# EAGLE board test2 (EAGLE 9.5.0)
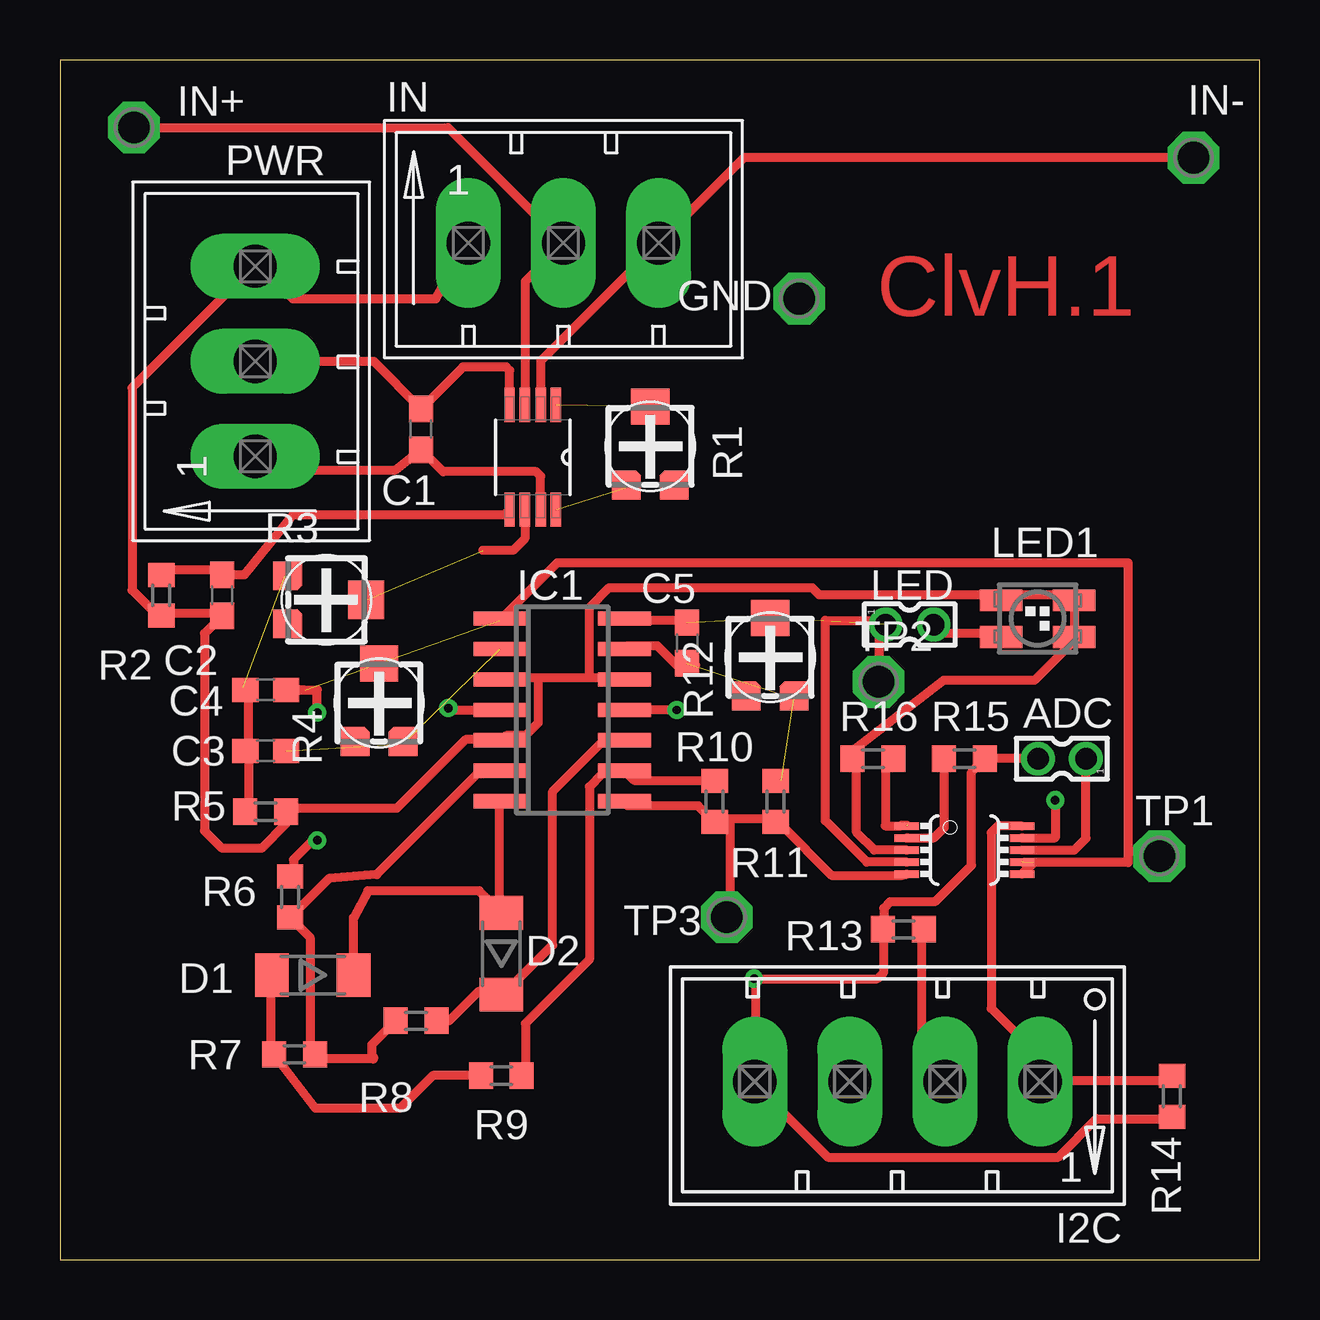
[diagram p0: board, top side]
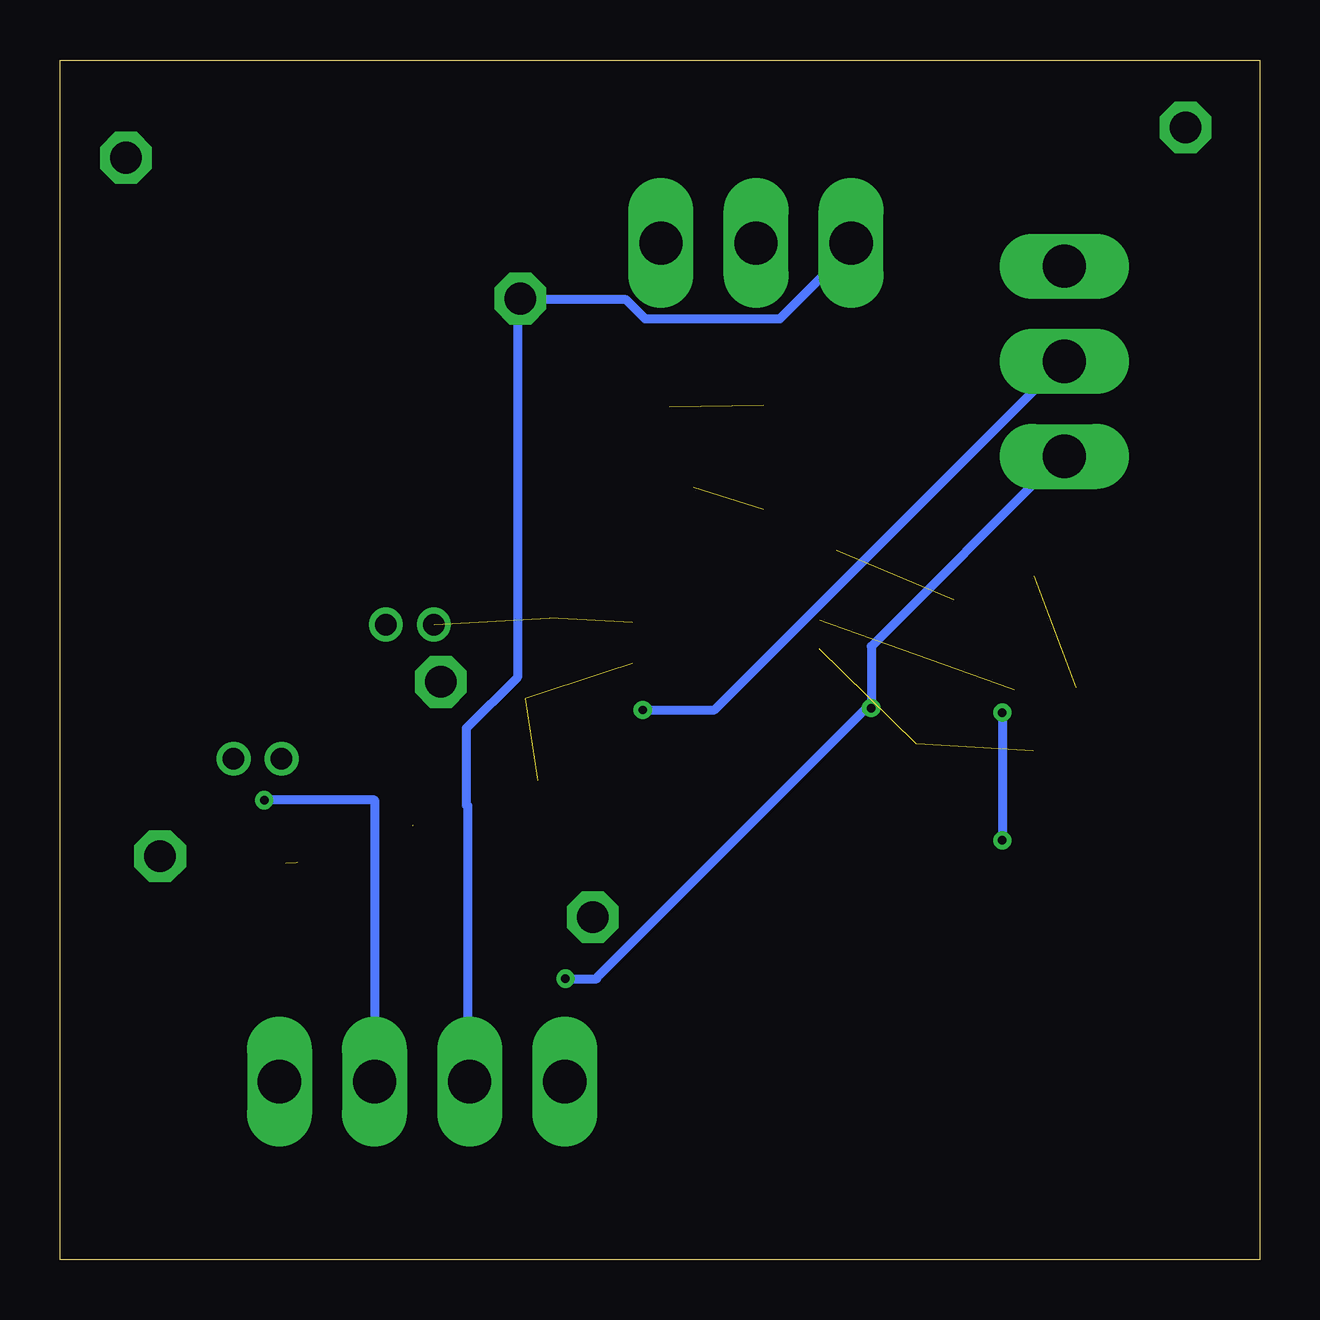
[diagram p1: board, bottom side, seen from below]

Size 50 x 50 mm. Coordinates in mm from the lower left corner, seen from the top.
Outline: 0,0 50,0 50,50 0,50 0,0
Copper layers (1*16): Top 0.035mm / dielectric 1.5mm / Bottom 0.035mm
Design rules "default *": minimum track width 15mil, minimum drill 0.35mm, track to track 6mil, track to pad 6mil, pad to pad 6mil, via to via 6mil, smd to smd 6mil, copper to edge 40mil, drill to drill 6mil, minimum pad ring 10mil, minimum via ring 8mil, stop-mask expansion 4mil, vias tented up to drill 0mil, thermal gap 10mil

## Footprints (pad centres in the part's own frame; a part is rotated, then mirrored left to right if it is on the bottom)
332-02 = drill 0.9 pad 1.27: 1 0,-1; 2 0,1
C0603 = smd 1.1 x 1: 1 -0.85,0; 2 0.85,0
SOD80 = smd 1.4 x 1.8: 1 -1.7,0; 2 1.7,0
P1-13 = drill 1.321 pad 2.159 octagon: TP 0,0
MT6-4Y = drill 1.803 long: 1 -5.944,0; 2 -1.981,0; 3 1.981,0; 4 5.944,0
SO14 = smd 0.6 x 2.2: 1 -3.81,-2.6; 2 -2.54,-2.6; 3 -1.27,-2.6; 4 0,-2.6; 5 1.27,-2.6; 6 2.54,-2.6; 7 3.81,-2.6; 8 3.81,2.6; 9 2.54,2.6; 10 1.27,2.6; 11 0,2.6; 12 -1.27,2.6; 13 -2.54,2.6; 14 -3.81,2.6
MT6-3 = drill 1.803 long: 1 2.54,0; 2 6.502,0; 3 10.465,0
P-LCC-4-3 = smd 0.914 x 1.778: 1 -0.762,-1.524; 2 -0.762,1.524; 3 0.762,1.524; 4 0.762,-1.524
SOP65P490X110-8N = smd 1.422 x 0.432: 1 -2.184,0.965; 2 -2.184,0.33; 3 -2.184,-0.33; 4 -2.184,-0.965; 5 2.184,-0.965; 6 2.184,-0.33; 7 2.184,0.33; 8 2.184,0.965
RTRIM4G/J = smd 1.2 x 1: 1 -1,-1.72; 3 1,-1.72 | smd 1.6 x 1.5: 2 0,1.65 | smd 0.3 x 0.3 rotated 225: P$1 -0.6,-1.22; P$4 0.6,-1.22 | smd 1 x 0.25: P$2 -1.1,-1.13; P$3 1.1,-1.13
R0603 = smd 1 x 1.1: 1 -0.85,0; 2 0.85,0
MSOP10_0.5 = smd 0.3 x 1.02: 1 -1,-2.4; 2 -0.5,-2.4; 3 0,-2.4; 4 0.5,-2.4; 5 1,-2.4; 6 1,2.4; 7 0.5,2.4; 8 0,2.4; 9 -0.5,2.4; 10 -1,2.4

## Placement (x,y rotation side)
ADC  332-02  [332-02]  41.76,20.88 90 top
C1  0.1nF  [C0603]  15.06,34.61 90 top
C2  1nF  [C0603]  6.77,27.69 90 top
C3  0.1nF  [C0603]  8.58,21.21 180 top
C4  0.1nF  [C0603]  8.58,23.75 180 top
C5  0.1nF  [C0603]  26.13,25.7 270 top
D1  [SOD80]  10.54,11.86 180 top
D2  [SOD80]  18.4,12.75 90 top
GND  PTR1PAD1-13  [P1-13]  30.81,40.06 0 top
I2C  [MT6-4Y]  34.91,7.41 180 top
IC1  LMV324M  [SO14]  20.94,22.91 270 top
IN  [MT6-3]  14.49,42.37 0 top
IN+  PTR1PAD1-13  [P1-13]  3.09,47.19 0 top
IN-  PTR1PAD1-13  [P1-13]  47.25,45.92 0 top
LED  332-02  [332-02]  35.41,26.46 270 top
LED1  [P-LCC-4-3]  40.75,26.72 90 top
PRECI_AMP  INA326EA/250  [SOP65P490X110-8N]  19.71,33.44 270 top
PWR  [MT6-3]  8.14,30.94 90 top
R1  [RTRIM4G/J]  24.6,33.9 0 top
R2  100k  [R0603]  4.23,27.69 90 top
R3  [RTRIM4G/J]  11.1,27.5 270 top
R4  [RTRIM4G/J]  13.3,23.2 0 top
R5  100k  [R0603]  8.58,18.67 0 top
R6  100k  [R0603]  9.59,15.11 270 top
R7  100k  [R0603]  9.78,8.55 180 top
R8  100k  [R0603]  14.84,9.95 0 top
R9  100k  [R0603]  18.4,7.67 0 top
R10  100k  [R0603]  27.29,19.1 270 top
R11  100k  [R0603]  29.83,19.1 90 top
R12  [RTRIM4G/J]  29.6,25.1 0 top
R13  100k  [R0603]  35.16,13.76 180 top
R14  100k  [R0603]  46.35,6.81 90 top
R15  100k  [R0603]  37.7,20.88 180 top
R16  100k  [R0603]  33.89,20.88 180 top
TP1  PTR1PAD1-13  [P1-13]  45.83,16.81 0 top
TP2  PTR1PAD1-13  [P1-13]  34.13,24.08 0 top
TP3  PTR1PAD1-13  [P1-13]  27.79,14.27 0 top
U$1  ADS1015IDGT  [MSOP10_0.5]  37.7,17.07 270 top

## Library data of the parts
ADC LED = con-garry
C1-C5 = rcl; SPICEPREFIX: C
D1 D2 = semicon-smd-ipc
GND IN+ IN- TP1-TP3 = testpad
I2C = con-amp-mt; OC_FARNELL: unknown; OC_NEWARK: unknown
IC1 = linear; SPICEPREFIX: J
IN PWR = con-amp-mt6; OC_FARNELL: unknown; OC_NEWARK: unknown
LED1 = led
PRECI_AMP = INA326EA_250; DESCRIPTION: Precision, Low Drift, CMOS Instrumentation Amplifier 8-VSSOP -40 to 85; DIGI-KEY_PART_NUMBER: 296-15312-1-ND; DIGI-KEY_PURCHASE_URL: https://www.digikey.com/product-detail/en/texas-instruments/INA326EA-250/296-15312-1-ND/568254?utm_source=snapeda&utm_medium=aggregator&utm_campaign=symbol; MF: Texas Instruments; MP: INA326EA/250; PACKAGE: MSOP-8 Texas Instruments
R1 R3 R4 R12 = trimmer; SPICEMODEL: X; SPICEPREFIXL: POT
R2 R5-R11 R13-R16 = rcl; SPICEPREFIX: R
U$1 = ADS1015; AVAILABILITY: Unavailable; DESCRIPTION: 12-Bit ADC with Integrated MUX PGA Comparator Oscillator and Reference; MF: Texas Instruments; MP: ADS1015; PACKAGE: XFQFN-10 Texas Instruments; PRICE: None

## Nets
GNDA: C2.1 GND.TP I2C.3 IC1.3 IC1.5 IC1.12 IN.1 LED1.1 LED1.3 LED1.4 PWR.3 R2.1 R5.2 R16.2 U$1.3
N$1: PRECI_AMP.1 R1.2
N$2: PRECI_AMP.8 R1.1
N$3: IN+.TP IN.2 PRECI_AMP.3
N$4: C2.2 PRECI_AMP.5 R2.2
N$5: IN-.TP IN.3 PRECI_AMP.2
N$6: C3.2 C4.2 R3.1 R5.1
N$7: C3.1 IC1.2 R4.3
N$8: C4.1 IC1.1 R4.2 R6.1 TP1.TP U$1.6 U$1.7
N$9: PRECI_AMP.6 R3.2
N$10: IC1.6 R6.2 R7.1 R8.1
N$11: D2.1 IC1.10 R8.2
N$12: IC1.9 R9.2 R10.1
N$13: D1.1 D2.2 IC1.7
N$14: D1.2 R7.2 R9.1
N$15: IC1.8 R10.2 R11.1 TP3.TP U$1.5
N$16: C5.2 IC1.13 R11.2 R12.3
N$17: I2C.2 R13.1 U$1.9
N$18: R16.1 U$1.1
N$19: R15.2 U$1.2
N$20: LED1.2 LED.2
N$21: I2C.1 R14.2 U$1.10
N$22: C5.1 IC1.14 LED.1 R12.2 TP2.TP U$1.4
V+: ADC.2 C1.1 I2C.4 IC1.4 PRECI_AMP.7 PWR.1 R13.2 R14.1 R15.1
V-: C1.2 IC1.11 PRECI_AMP.4 PWR.2
VDD: ADC.1 U$1.8

## Tracks (layer width: path | path; a pad name or v marks a point on that pad's centre or on a via)
GNDA
  Top 0.381: PWR.3 8.37,41.38 9.7,40.04 15.66,40.04 IN.1 17.03,40.08 | 22.07,24.24 23.4,24.24 IC1.12 | 22.07,24.24 19.93,24.24 | 19.93,24.24 18.6,24.24 IC1.3 | 22.07,24.24 22.07,27.18 22.89,28 31.35,28 31.64,27.71 39.16,27.71 LED1.3 39.22,27.66 39.26,27.7 42.23,27.7 42.27,27.66 LED1.4 LED1.1 42.27,25.8 40.61,24.14 36.83,24.14 33.04,21.21 R16.2 33.2,20.74 33.2,17.8 33.94,17.07 U$1.3 | 19.93,24.24 19.93,22.38 19.4,21.84 18.6,21.84 IC1.5 18.3,21.67 16.91,21.67 14.04,18.81 9.46,18.81 R5.2 9.43,18.17 8.4,17.14 6.76,17.14 6.03,17.88 6.03,26.1 C2.1 6.67,26.94 4.27,26.94 R2.1 4.07,26.84 3,27.9 3,36.34 8,41.34 PWR.3 | 8.1,41.38 PWR.3 | GND.TP 30.91,40.16
  Bottom 0.381: I2C.3 33,7.44 33,18.91 33.07,18.94 33.07,22.14 30.94,24.27 30.94,40.01 GND.TP | 31,40.01 GND.TP | GND.TP 30.67,40.01 26.4,40.01 25.6,39.2 20,39.2 17.07,42.14 IN.1
N$1  (1 unrouted)
N$2  (1 unrouted)
N$3
  Top 0.381: PRECI_AMP.3 19.39,35.63 19.39,40.77 IN.2 16.17,47.19 IN+.TP
N$4
  Top 0.381: R2.2 4.26,28.74 6.66,28.74 C2.2 7.68,28.54 9.72,31.05 18.54,31.05 PRECI_AMP.5
N$5
  Top 0.381: PRECI_AMP.2 20.04,37.45 IN.3 28.51,45.92 IN-.TP
N$6  (1 unrouted)
  Top 0.381: 7.87,21.21 7.87,18.81 R5.1 | 7.87,21.21 7.87,23.61 C4.2 7.63,23.85 | 7.87,21.21 C3.2
N$7  (2 unrouted)
N$8  (via drill 0.35)  (4 unrouted)
  Top 0.381: v10.72,22.8 10.72,23.75 C4.1 9.44,23.73 10.21,23.73 | 40.16,16.55 44.52,16.55 44.52,17.04 | 44.52,17.04 44.52,29.04 20.73,29.04 18.6,26.91 IC1.1 18.33,26.64 | R6.1 9.73,16.14 9.73,16.67 10.53,17.47 v10.72,17.47 | 44.52,17.04 45.8,17.04 TP1.TP | 40.6,16.53 40.57,16.53 U$1.6
  Bottom 0.381: v10.72,22.8 v10.72,17.47
N$9  (1 unrouted)
  Top 0.381: PRECI_AMP.6 19.38,30.05 18.88,29.55 17.63,29.55
N$10
  Top 0.381: IC1.6 18.33,20.24 17.53,20.24 IC1.6 | R8.1 12.99,8.95 12.99,8.55 13.06,8.44 13.06,8.36 10.66,8.36 10.66,8.44 R7.1 10.42,8.76 10.42,13.43 R6.2 11.21,15.88 13.21,16.05 17.54,20.38 18.33,20.38 IC1.6
N$11
  Top 0.381: IC1.10 23.4,21.57 22.6,21.57 20.53,19.51 20.53,13.11 18.6,11.17 D2.1 18.33,11.17 17.44,11.17 16.22,9.95 R8.2
N$12
  Top 0.381: R9.2 19.4,7.71 19.4,9.84 22.07,12.51 22.07,19.71 22.6,20.24 23.4,20.24 IC1.9 23.67,20.24 23.93,19.97 27.13,19.97 R10.1
N$13
  Top 0.381: IC1.7 18.33,18.91 18.33,14.64 D2.2 17.47,15.37 12.84,15.37 12.24,14.24 D1.1
N$14
  Top 0.381: R9.1 15.55,7.67 14.18,6.31 10.65,6.31 R7.2 8.8,8.71 8.8,11.64 D1.2
N$15
  Top 0.381: U$1.5 35.1,16.01 32.16,16.01 30.07,18.11 R11.1 29.8,18.37 27.93,18.37 | 27.93,18.37 27.4,18.37 R10.2 27.13,18.37 26.6,18.91 23.67,18.91 IC1.8 | 27.93,18.37 27.93,14.37 TP3.TP
N$16  (2 unrouted)
  Top 0.381: 26.5,24.77 26.23,24.77 C5.2 26.5,24.77 | 30.07,19.97 R11.2 | 26.5,24.77 26.23,24.51 25.97,24.51 24.9,25.57 23.67,25.57 IC1.13
N$17  (via drill 0.35)
  Top 0.381: U$1.9 41.48,17.57 v41.48,19.15 | R13.1 35.94,13.57 35.94,8.24 36.73,7.44 I2C.2
  Bottom 0.381: v41.48,19.15 36.89,19.15 I2C.2
N$18  (1 unrouted)
  Top 0.381: R16.1 34.4,20.53 34.4,18.08 35.06,18.08 35.09,18.11 35.3,18.11
N$19
  Top 0.381: R15.2 36.85,17.99 36.43,17.57 U$1.2
N$20
  Top 0.381: LED1.2 39.13,26.11 36.73,26.11 36.47,26.38 LED.2
N$21
  Top 0.381: U$1.10 39.08,18.07 38.82,17.8 38.82,10.46 40.85,8.43 I2C.1 41.07,7.47 46.14,7.47 R14.2
N$22  (2 unrouted)
  Top 0.381: U$1.4 33.63,16.57 31.9,18.29 31.9,26.64 34.33,26.64 LED.1 34.13,26.18 TP2.TP | IC1.14 23.67,26.64 25.97,26.64 C5.1
V+  (via drill 0.35)
  Top 0.381: PRECI_AMP.7 20.04,32.65 19.85,32.84 15.97,32.84 C1.1 13.99,32.91 8.83,32.91 8.37,33.38 PWR.1 | IC1.4 16.26,22.91 v16.19,22.98 | 29,11.71 | 29,11.71 29,7.47 28.96,7.43 I2C.4 29.07,7.2 32,4.27 41.6,4.27 43.2,5.87 46.14,5.87 R14.1 | 29,11.71 34.07,11.71 34.33,11.97 34.33,13.57 R13.2 34.33,13.84 34.33,14.64 34.6,14.91 36.47,14.91 37.99,16.43 37.99,20.32 R15.1 ADC.2 | v28.93,11.71 29,11.71
  Bottom 0.381: PWR.1 8.37,33.38 16.19,25.55 v16.19,22.98 16.39,22.98 27.65,11.72 27.63,11.71 v28.93,11.71
V-  (via drill 0.35)
  Top 0.381: v25.71,22.91 IC1.11 | PWR.2 13.07,37.44 C1.2 16.8,37.2 18.6,37.2 18.74,37.06 PRECI_AMP.4
  Bottom 0.381: v25.71,22.91 22.72,22.91 8.19,37.44 PWR.2
VDD
  Top 0.381: U$1.8 42.27,17.07 42.76,17.56 ADC.1

## Text on the board
Top: ClvH.1